# EAGLE board JetRacerWIfiAntennaSupport_partsRev3 (EAGLE 9.6.2)

Size 148.35 x 50.36 mm. Coordinates in mm from the lower left corner, seen from the top.
Outline: 10.03,43.15 arc90 6.68,46.55 arc59 4.03,45.05 4.03,41.25 arc59 6.68,39.8 arc90 10.03,43.15
Outline: 42.18,0 2.23,36.65 arc-141 9.13,50.3 30.48,41.35 arc24 30.18,39.8 arc158 37.83,38.25 62.28,28 86.08,28 110.53,38.25 arc158 118.18,39.8 arc24 117.88,41.35 139.23,50.3 arc-141 146.13,36.65 106.18,0 42.18,0
Outline: 138.33,43.15 arc-90 141.68,46.55 arc-59 144.33,45.05 144.33,41.25 arc-59 141.68,39.8 arc-90 138.33,43.15
Copper layers (1*16): Top 0.035mm / dielectric 1.5mm / Bottom 0.035mm
Design rules "SeeedStudio_2layer_DRU_no_angle_20140221": minimum track width 6mil, minimum drill 12mil, track to track 6mil, track to pad 6mil, pad to pad 6mil, via to via 6mil, smd to smd 0mil, copper to edge 10mil, drill to drill 10mil, minimum pad ring 10mil, minimum via ring 6mil, stop-mask expansion 2mil, vias tented up to drill 100mil, thermal gap 10mil
Holes 3.6 mm at 52.18,8.5 96.18,8.5 52.18,18.5 96.18,18.5

## Placement (x,y rotation side)
E$1  [LOGO_FABO_L]  74.02,13.73 0 top

## Library data of the parts
E$1 = FaBo-Logo

## Text on the board
tPlace: TOP | JR-WS
bPlace: BOTTOM | Rev3
tDocu: 長径 6.7mm / 短径 5.7mm *2 | Φ3.6mm*4 | JetRacerWifiSupportRev3(JR-WS)